# Altium PCB 3043-1-1532.PcbDoc (part 2 of 2)
Units mm, origin at the board's own origin, x right, y up, seen from the top; angles counter-clockwise.
Board outline 86 x 85.71 mm, 4 copper layers (Top Layer, MidLayer1, MidLayer2, Bottom Layer); 155 components, 106 nets, 490 pads, 369 vias.
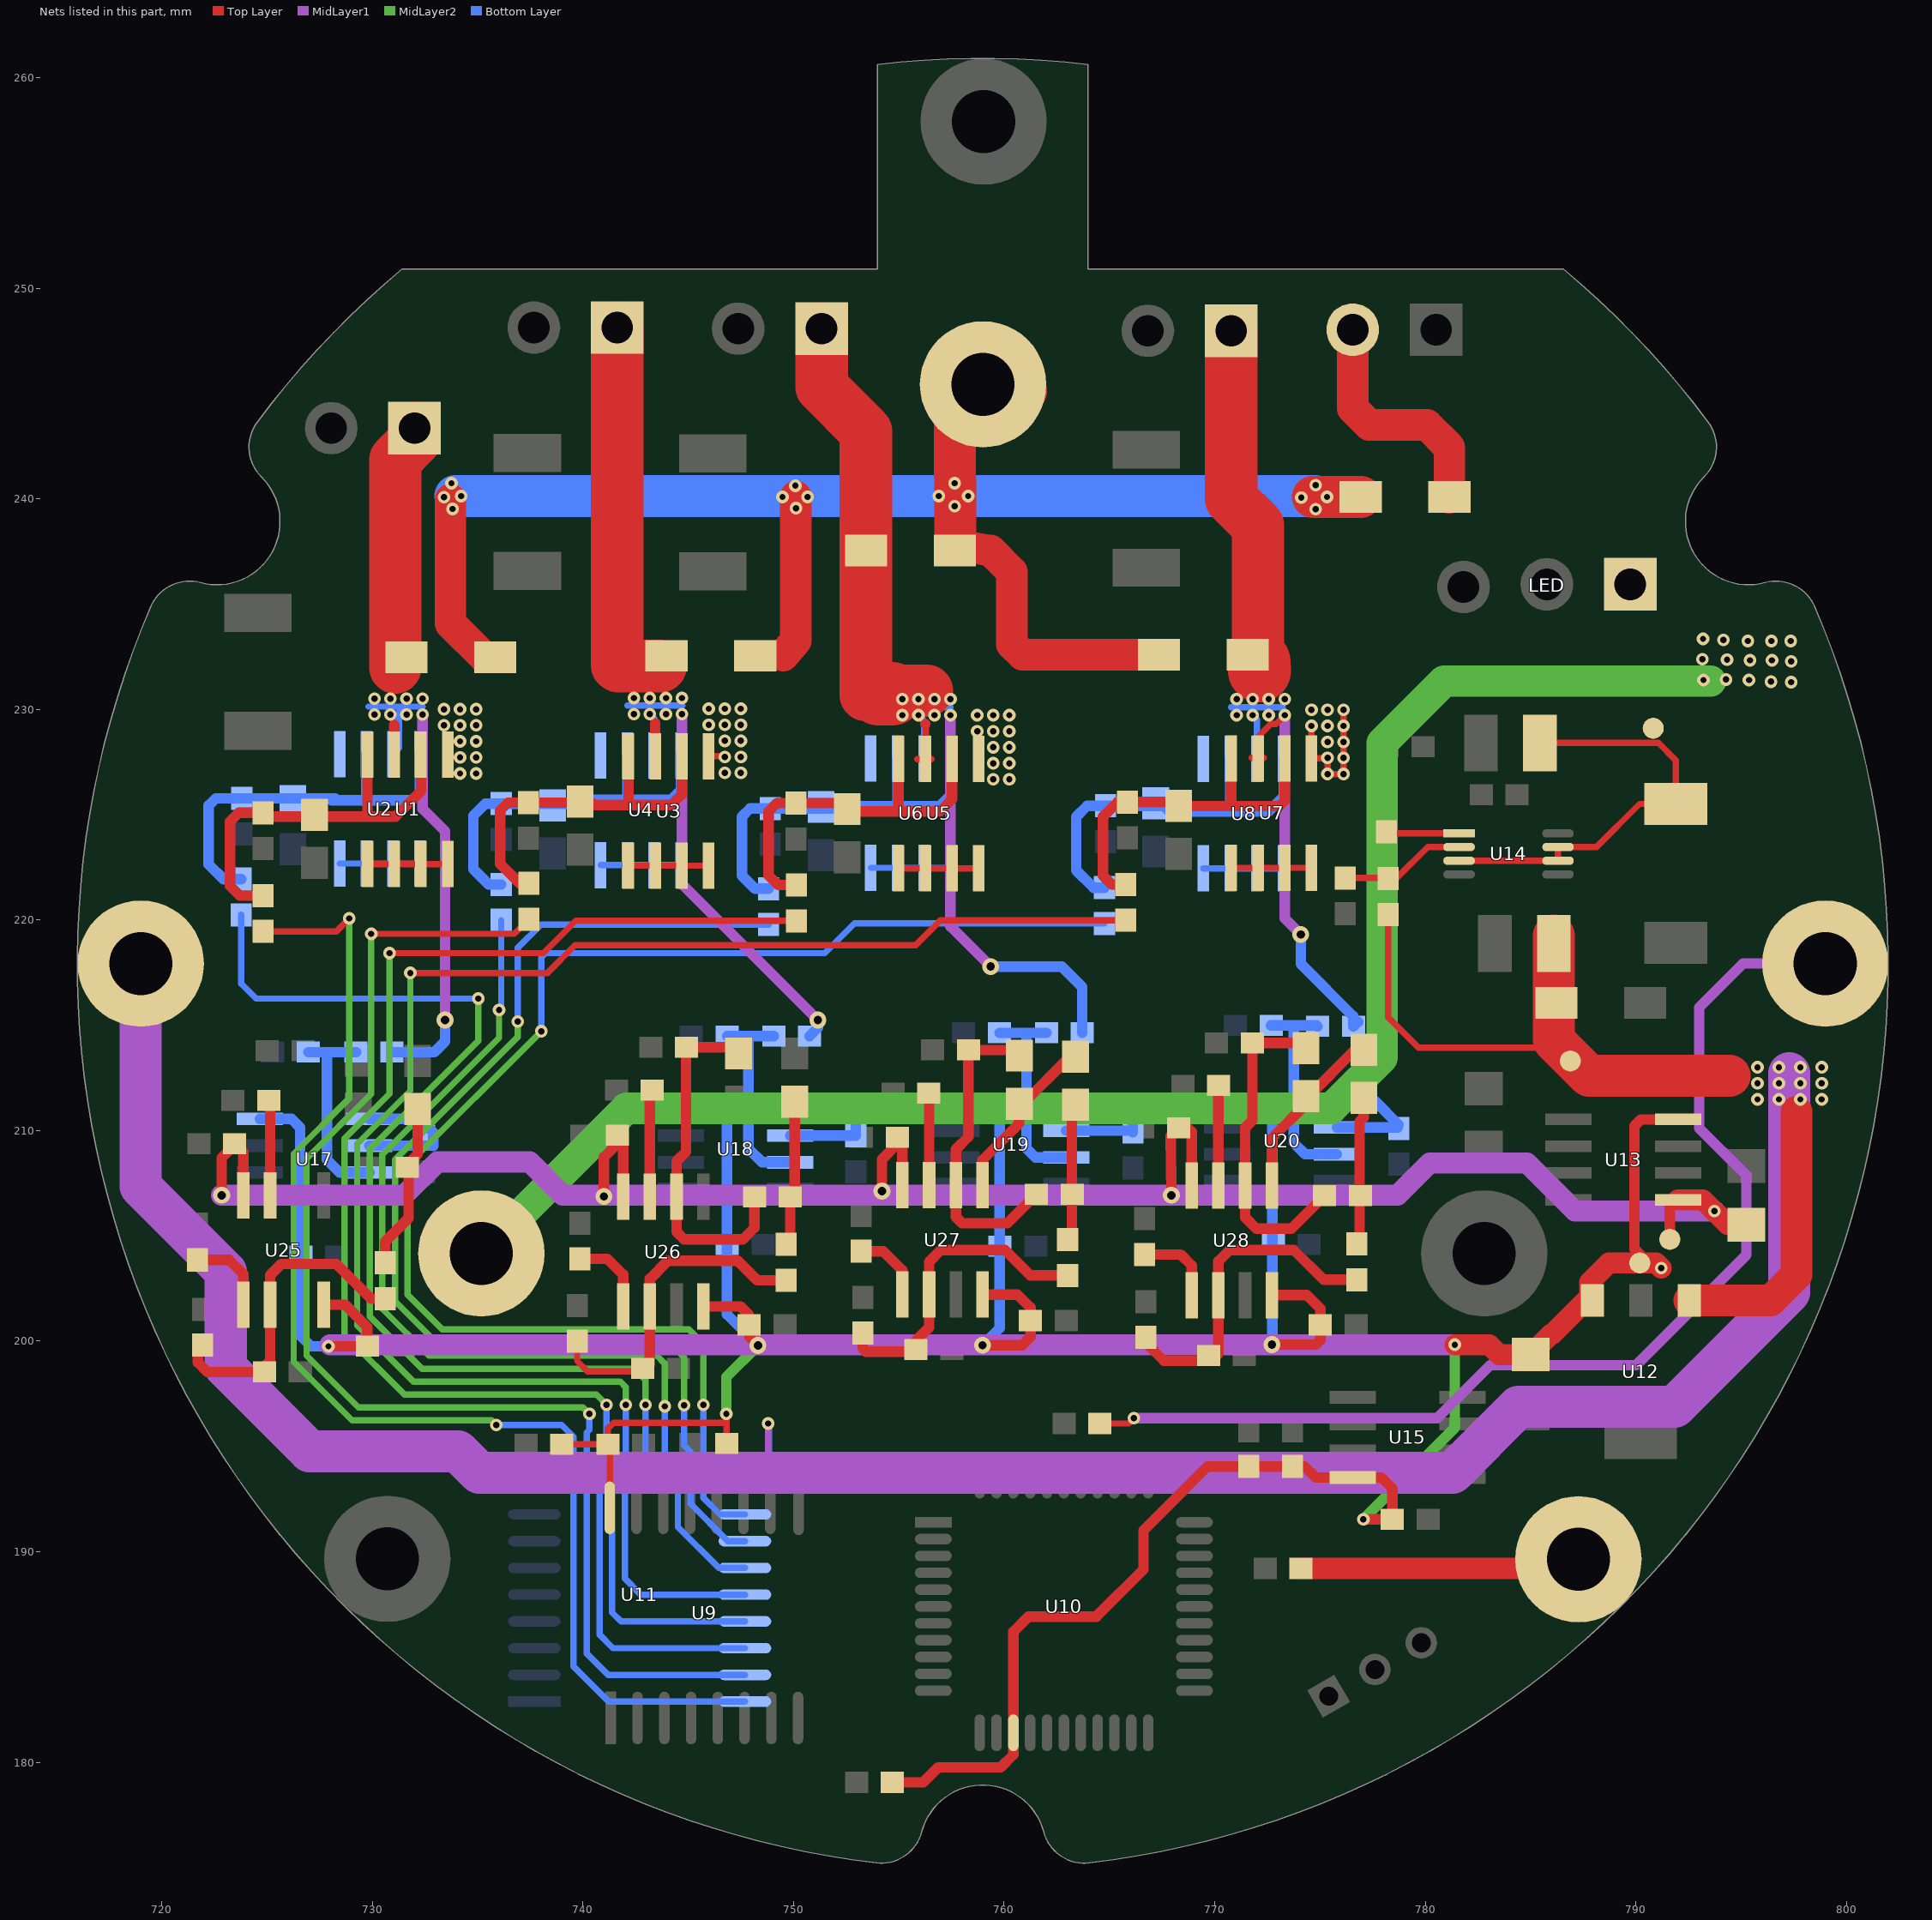
[diagram p4: the nets of this part, all layers, seen from the top]

## Via types
v1: diameter 0.6, hole 0.3, Top Layer to Bottom Layer, 347 vias
v2: diameter 0.8, hole 0.4, Top Layer to Bottom Layer, 22 vias

## Nets (pads, with @x,y where several pads share a name; then routed paths per layer and width w, separated by ;. In a path a pad name is that pad's centre, name@x,y a point inside that pad or via, vN(x,y) a via of type N, cw(c..) or ccw(c..) an arc to the next point about the centre after c; other vN are vias at no path point) (continued)
NetD8_2: D8.2 R44.2 R46.1 U26.2 | length 17.2
  Top Layer w0.5: R46.1@744.892,214.055 744.892,208.987 744.449,208.544 744.449,205.191 744.804,204.835 747.598,204.835 748.145,205.382 R44.2@748.145,206.842 ; R46.1@744.918,213.954 D8.2@747.573,213.954
NetD9_1: D9.1 R43.1 R47.2 | length 7.9
  Top Layer w0.5: R47.2@730.606,203.715 730.606,204.724 731.723,205.842 731.723,208.439 732.15,208.866 D9.1@732.15,211.019
NetD10_1: D10.1 R44.1 R48.2 | length 6.9
  Top Layer w0.5: R48.2@749.845,204.607 R44.1@749.845,206.842 750.057,207.053 D10.1@750.057,211.374
NetD11_1: D11.1 D13.2 U27.1 | length 7.9
  Top Layer w0.5: U27.1@758.977,207.41 758.977,208.597 760.705,210.324 760.705,211.084 D13.2@763.219,213.598
NetD11_2: D11.2 R57.2 R59.1 U27.2 | length 15.1
  Top Layer w0.5: D11.2@760.705,213.824 758.306,213.824 R59.1@758.303,213.827 758.303,209.698 757.707,209.102 757.707,205.902 758.012,205.597 760.159,205.597 R57.2@761.531,206.969
NetD12_1: D12.1 D14.2 U28.1 | length 8.5
  Top Layer w0.5: U28.1@772.719,207.384 772.719,209.636 774.339,211.256 D12.1@774.339,211.628 ; D12.1@774.457,211.628 776.667,213.838 D14.2@777.082,213.838 D14.2@777.082,213.745
NetD12_2: D12.2 R58.2 R60.1 U28.2 | length 15.7
  Top Layer w0.5: D12.2@774.319,213.977 774.139,214.157 R60.1@771.791,214.157 771.791,210.486 771.449,210.144 771.449,205.877 771.982,205.343 773.647,205.343 R58.2@775.222,206.918
NetD13_1: D13.1 R57.1 R61.2 | length 6.5
  Top Layer w0.5: R61.2@763.219,204.822 763.219,211.049 D13.1@763.392,211.222
NetD14_1: D14.1 R58.1 R62.2 | length 7
  Top Layer w0.5: R62.2@776.884,204.657 776.884,210.426 777.082,210.624 D14.1@777.082,211.552
NetD19_2: D19.2 D20.2 D21.2 D22.2 D23.2 VMNG_IN.1 | length 85.7
  Top Layer w1.5: 733.704,239.979 733.704,234.086 735.32,232.47 D19.2@736.067,232.47 ; 749.503,232.547 750.113,233.258 750.113,240.116 ; D21.2@757.682,237.82 759.358,237.541 760.374,236.525 760.374,233.096 760.873,232.597 D22.2@767.359,232.597
  Top Layer w2: VMNG_IN.1@757.479,246.186 759.943,246.186 VMNG_IN.1@761.034,245.095 ; D21.2@757.682,237.82 757.657,244.17 VMNG_IN.1@758.927,245.44 ; 774.675,240.09 D23.2@776.935,240.09
  Bottom Layer w2: v1@733.933,240.132 774.776,240.132
  other v1: 774.802,239.506 733.806,239.522 750.113,239.557 757.657,239.649 774.116,240.065 733.4,240.081 749.478,240.09 750.672,240.09 775.335,240.09 734.212,240.132 756.895,240.132 758.292,240.132 750.087,240.624 774.802,240.649 733.755,240.741 757.657,240.741
NetR14_2: R14.2 R15.1 U14.2 | length 6
  Top Layer w0.3: R15.1@776.199,221.992 778.649,221.992 780.121,223.464 U14.2@781.609,223.464
NetR24_1: R24.1 R28.2 U17.3 | length 9.6
  Bottom Layer w0.5: R28.2@726.96,213.725 R24.1@729.222,213.725 ; 727.837,213.725 727.837,208.62 728.445,208.012 U17.3@729.853,208.012
NetR25_1: R25.1 R29.2 U18.3 | length 9.8
  Bottom Layer w0.5: R29.2@746.848,214.487 R25.1@749.06,214.487 ; 747.852,214.487 747.852,209.153 748.513,208.493 U18.3@749.843,208.493
NetR26_1: R26.1 U17.1 U17.2 | length 7
  Bottom Layer w0.5: U17.2@729.853,209.282 R26.1@732.856,209.282 ; U17.1@729.853,210.552 732.255,210.552 732.892,209.915 R26.1@732.892,209.267
NetR27_1: R27.1 U18.1 U18.2 | length 7.1
  Bottom Layer w0.5: U18.2@749.843,209.763 R27.1@752.944,209.763 ; U18.1@749.843,211.033 752.323,211.033 752.958,210.398 R27.1@752.958,209.749
NetR30_1: R30.1 R34.2 U19.3 | length 9.8
  Bottom Layer w0.5: R34.2@759.777,214.64 R30.1@762.014,214.64 ; 761.06,214.64 761.06,209.153 761.492,208.721 U19.3@762.949,208.721
NetR31_1: R31.1 R35.2 U20.3 | length 10.1
  Bottom Layer w0.5: R35.2@772.68,214.995 774.841,214.995 R31.1@774.891,214.944 ; 773.76,214.995 773.76,209.407 774.294,208.874 U20.3@775.801,208.874
NetR32_1: R32.1 U19.1 U19.2 | length 7.2
  Bottom Layer w0.5: U19.2@762.949,209.991 766.05,209.991 R32.1@766.115,209.927 766.115,210.449 765.302,211.261 U19.1@762.949,211.261
NetR33_1: R33.1 U20.1 U20.2 | length 6.3
  Bottom Layer w0.5: U20.2@775.801,210.144 R33.1@778.7,210.144 ; U20.1@775.801,211.414 777.596,211.414 R33.1@778.739,210.271
NetR37_1: R37.1 U14.1 | length 3.4
  Top Layer w0.3: R37.1@778.219,224.114 U14.1@781.609,224.114
NetR39_1: R39.1 R40.2 R47.1 U25.6 | length 15.3
  Top Layer w0.5: R39.1@721.716,199.792 721.716,198.991 722.173,198.533 R40.2@724.879,198.533 ; R40.2@724.662,198.584 725.145,199.067 725.145,203.131 725.678,203.664 728.287,203.664 729.936,202.015 R47.1@730.606,202.015
NetR41_1: R41.1 R42.2 R48.1 U26.6 | length 16.4
  Top Layer w0.3: R41.1@739.724,199.988 739.724,199.06 740.223,198.561 R42.2@742.837,198.561
  Top Layer w0.5: R42.2@742.645,198.561 742.837,198.561 743.179,198.903 743.179,202.956 744.042,203.819 747.344,203.819 748.27,202.893 R48.1@749.859,202.893
NetR49_1: R49.1 U25.3 | length 4.5
  Top Layer w0.5: U25.3@725.145,206.925 R49.1@725.145,211.375
NetR50_1: R50.1 U26.3 | length 5
  Top Layer w0.5: U26.3@743.179,206.851 R50.1@743.179,211.808
NetR51_1: R51.1 U25.5 | length 3.9
  Top Layer w0.5: R51.1@721.69,203.856 723.201,203.856 723.875,203.182 U25.5@723.875,201.725
NetR52_1: R52.1 U26.5 | length 4
  Top Layer w0.5: R52.1@739.699,203.909 741.158,203.909 741.909,203.159 U26.5@741.909,201.651
NetR53_1: R53.1 R54.2 R61.1 U27.6 | length 15.3
  Top Layer w0.5: R53.1@753.288,200.378 753.288,199.654 753.44,199.501 R54.2@755.816,199.501 ; R54.2@755.816,199.603 755.816,200.031 756.437,200.653 756.437,203.768 756.996,204.327 760.044,204.327 761.25,203.122 R61.1@763.219,203.122
NetR55_1: R55.1 R56.2 R62.1 U28.6 | length 16.2
  Top Layer w0.5: R55.1@766.724,200.175 766.724,199.933 767.588,199.069 769.837,199.069 770.179,199.411 770.179,203.794 770.712,204.327 773.76,204.327 775.169,202.918 R62.1@776.961,202.918
NetR63_1: R63.1 U27.3 | length 4.3
  Top Layer w0.5: U27.3@756.437,207.41 R63.1@756.437,211.756
NetR64_1: R64.1 U28.3 | length 4.8
  Top Layer w0.5: U28.3@770.179,207.384 R64.1@770.179,212.139
NetR65_1: R65.1 U27.5 | length 3.5
  Top Layer w0.5: R65.1@753.212,204.265 754.265,204.265 755.167,203.362 U27.5@755.167,202.21
NetR66_1: R66.1 U28.5 | length 3.9
  Top Layer w0.5: R66.1@766.674,204.112 768.387,204.112 768.909,203.591 U28.5@768.909,202.184
NetU1_5: U1.5 U1.6 U1.7 U1.8 | length 3.8
  Top Layer w0.3: U1.5@729.767,222.657 U1.8@733.577,222.657
NetU2_5: U2.5 U2.6 U2.7 U2.8 | length 3.8
  Bottom Layer w0.3: U2.8@728.447,222.682 U2.5@732.257,222.682
NetU3_5: U3.5 U3.6 U3.7 U3.8 | length 3.8
  Top Layer w0.3: U3.5@742.163,222.581 U3.8@745.973,222.581
NetU4_5: U4.5 U4.6 U4.7 U4.8 | length 3.8
  Bottom Layer w0.3: U4.8@740.842,222.606 U4.5@744.652,222.606
NetU5_5: U5.5 U5.6 U5.7 U5.8 | length 3.8
  Top Layer w0.3: U5.5@754.99,222.454 U5.8@758.8,222.454
NetU6_5: U6.5 U6.6 U6.7 U6.8 | length 3.8
  Bottom Layer w0.3: U6.8@753.669,222.479 U6.5@757.479,222.479
NetU7_5: U7.5 U7.6 U7.7 U7.8 | length 3.8
  Top Layer w0.3: U7.5@770.788,222.479 U7.8@774.598,222.479
NetU8_5: U8.5 U8.6 U8.7 U8.8 | length 3.8
  Bottom Layer w0.3: U8.8@769.468,222.454 U8.5@773.278,222.454
NS1_1: R17.1 U11.18 | length 61
  Top Layer w0.3: R17.1@724.814,219.454 728.282,219.454 v1(728.904,220.075)
  MidLayer2 w0.3: v1(728.904,220.075) 728.904,211.537 726.262,208.895 726.262,199.009 729.031,196.24 735.66,196.24 v1(735.889,196.012)
  Bottom Layer w0.3: v1(735.889,196.012) 738.988,196.012 739.546,195.453 739.546,184.556 741.223,182.88 U11.18@747.692,182.88
NS1_2: R18.1 U11.17 | length 63
  Top Layer w0.3: v1(729.945,219.339) 736.739,219.339 R18.1@737.438,220.038
  MidLayer2 w0.3: v1(729.945,219.339) 729.945,211.73 726.872,208.656 726.872,199.314 729.336,196.85 740.004,196.85 v1(740.308,196.545)
  Bottom Layer w0.3: v1(740.308,196.545) 740.308,195.783 740.187,195.661 740.187,185.161 741.197,184.15 U11.17@747.692,184.15
NS1_3: R19.1 U11.16 | length 71.2
  Top Layer w0.3: v1(730.809,218.424) 738.124,218.424 739.662,219.962 R19.1@750.138,219.962 R19.1@750.138,219.77
  MidLayer2 w0.3: v1(730.809,218.424) 730.809,211.745 728.675,209.611 728.675,200.304 731.52,197.46 740.639,197.46 v1(741.121,196.977)
  Bottom Layer w0.3: v1(741.121,196.977) 741.121,194.996 740.787,194.661 740.787,186.059 741.426,185.42 U11.16@747.692,185.42
NS1_4: R20.1 U11.15 | length 84.2
  Top Layer w0.3: v1(731.799,217.484) 738.302,217.484 739.623,218.805 755.802,218.805 756.984,219.987 R20.1@765.785,219.987
  MidLayer2 w0.3: v1(731.799,217.484) 731.799,211.887 729.275,209.363 729.275,200.746 731.952,198.069 741.782,198.069 742.036,197.815 v1(742.036,196.977)
  Bottom Layer w0.3: v1(742.036,196.977) 742.036,194.513 741.387,193.864 741.387,187.11 741.807,186.69 U11.15@747.692,186.69
NS2_1: R21.1 U11.14 | length 62.3
  MidLayer2 w0.3: v1(735.025,216.265) 735.025,214.264 729.875,209.114 729.875,201.162 732.358,198.679 742.442,198.679 742.975,198.145 v1(742.975,196.977)
  Bottom Layer w0.3: R21.1@723.773,220.241 723.773,216.976 724.484,216.265 v1(735.025,216.265) ; v1(742.975,196.977) 742.975,194.285 741.987,193.296 741.987,188.72 742.747,187.96 U11.14@747.692,187.96
NS2_2: R22.1 U11.13 | length 47.3
  MidLayer2 w0.3: v1(736.016,215.732) 736.016,214.406 730.475,208.866 730.475,201.527 732.688,199.314 743.509,199.314 743.89,198.933 v1(743.89,196.901)
  Bottom Layer w0.3: v1(736.016,215.732) 736.117,215.833 R22.1@736.117,219.987 ; v1(743.89,196.901) 743.89,194.701 744.509,194.081 744.509,191.176 746.455,189.23 U11.13@747.692,189.23
NS2_3: R23.1 U11.12 | length 56.8
  MidLayer2 w0.3: v1(736.905,215.173) 736.905,214.447 731.075,208.617 731.075,201.892 733.044,199.923 744.118,199.923 744.804,199.238 v1(744.804,196.952)
  Bottom Layer w0.3: v1(736.905,215.173) 736.905,218.678 738.011,219.784 R23.1@748.817,219.784 ; v1(744.804,196.952) 744.804,195.047 745.109,194.742 745.109,192.278 746.887,190.5 U11.12@747.692,190.5
NS2_4: R36.1 U11.11 | length 70.7
  MidLayer2 w0.3: v1(738.022,214.716) 731.675,208.369 731.675,202.207 733.323,200.558 745.033,200.558 745.719,199.873 v1(745.719,196.977)
  Bottom Layer w0.3: v1(738.022,214.716) 738.022,218.221 738.226,218.424 751.484,218.424 752.895,219.835 R36.1@764.769,219.835 ; v1(745.719,196.977) 745.719,192.557 746.506,191.77 U11.11@747.692,191.77
RXD: R69.2 RxD.1 | length 53.5
  Top Layer w0.3: R69.2@764.552,196.088 765.912,196.088 v1(766.166,196.342)
  MidLayer1 w0.5: v1(766.166,196.342) 780.567,196.342 783.082,198.857 790.016,198.857 795.249,204.089 795.249,207.874 793.013,210.109 793.013,215.849 795.096,217.932 RxD.1@799,217.932
S1_1: D1.2 R1.1 R17.2 U1.2 U1.4 | length 19.2
  Top Layer w0.5: R17.2@724.814,221.154 723.71,221.154 723.24,221.625 723.24,224.673 723.658,225.091 R1.1@724.814,225.091 724.99,224.915 731.102,224.915 732.307,226.12 U1.2@732.307,227.857 ; 729.767,224.991 U1.4@729.767,227.857
S1_2: D4.2 R7.1 R18.2 U3.2 U3.4 | length 17.5
  Top Layer w0.5: R18.2@737.438,221.738 736.995,221.738 736.067,222.666 736.067,225.206 736.434,225.573 740.421,225.573 740.534,225.46 744.195,225.46 744.703,225.968 U3.2@744.703,227.781 ; 742.163,225.46 U3.4@742.163,227.781
S1_3: D6.2 R11.1 R19.2 U5.2 U5.4 | length 18.2
  Top Layer w0.5: R19.2@750.138,221.662 749.263,221.662 748.817,222.107 748.817,225.155 749.21,225.548 752.266,225.548 752.659,225.155 756.945,225.155 757.53,225.739 U5.2@757.53,227.654 ; 754.99,225.231 U5.4@754.99,227.654
S1_4: D16.2 R13.1 R20.2 U7.2 U7.4 | length 17.2
  Top Layer w0.5: R20.2@765.785,221.687 765.112,221.687 764.692,222.107 764.692,224.901 765.39,225.599 768.116,225.599 768.305,225.409 773.074,225.409 773.328,225.663 U7.2@773.328,227.679 ; 770.788,225.663 U7.4@770.788,227.679
S2_1: D2.2 R2.1 R21.2 U2.2 U2.4 | length 19.3
  Bottom Layer w0.3: 729.59,225.689 729.717,225.816
  Bottom Layer w0.5: R21.2@723.773,221.941 722.923,221.941 722.224,222.641 722.224,225.435 722.566,225.777 728.232,225.777 728.32,225.689 ; 728.066,225.689 731.876,225.689 732.257,226.07 U2.4@732.257,227.882 ; 729.717,225.816 U2.2@729.717,227.882
S2_2: D5.2 R10.1 R22.2 U4.2 U4.4 | length 18.2
  Bottom Layer w0.5: R22.2@736.117,221.687 735.521,221.687 734.797,222.412 734.797,224.952 735.367,225.523 739.939,225.523 740.131,225.714 744.195,225.714 744.652,226.171 U4.4@744.652,227.806 ; 742.112,225.765 U4.2@742.112,227.806
S2_3: D15.2 R12.1 R23.2 U6.2 U6.4 | length 18.7
  Bottom Layer w0.5: R23.2@748.817,221.484 748.171,221.484 747.547,222.107 747.547,224.901 747.94,225.294 752.512,225.294 752.627,225.409 756.945,225.409 757.479,225.943 U6.4@757.479,227.679 ; 754.939,225.435 U6.2@754.939,227.679
S2_4: D18.2 R16.1 R36.2 U8.2 U8.4 | length 18.9
  Bottom Layer w0.5: R36.2@764.769,221.535 764.249,221.535 763.422,222.361 763.422,224.901 763.942,225.421 767.573,225.421 767.839,225.155 772.566,225.155 773.278,225.866 U8.4@773.278,227.654 ; 770.738,225.206 U8.2@770.738,227.654
TXD: R68.2 TxD.1 | length 13.3
  Top Layer w0.5: TxD.1@786.841,189.205 TxD.1@787.273,189.636
  Top Layer w1: R68.2@774.102,189.205 TxD.1@786.841,189.205
V_BT1: -B1+.1 D19.1 R24.2 U1.3 U2.3 | length 38.4
  Top Layer w0.5: U1.3@731.037,227.857 731.037,229.27
  Top Layer w2.5: D19.1@731.088,232.004 731.088,241.859 732.003,242.773 -B1+.1@732.003,243.357
  MidLayer1 w0.5: v1(732.384,229.753) 732.384,225.282 733.45,224.215 v2(733.45,215.249)
  Bottom Layer w0.3: 729.818,230.134 732.384,230.134 ; v1@730.987,229.499 U2.3@730.987,227.882 731.266,228.162 731.266,230.134
  Bottom Layer w0.5: R24.2@730.922,213.725 732.942,213.725 733.45,214.233 v2(733.45,215.249)
  other v1: 730.098,229.753 730.86,229.753 731.622,229.753 730.098,230.515 730.86,230.515 731.622,230.515 732.384,230.515
V_BT2: -B2+.1 D20.1 R25.2 U3.3 U4.3 | length 44.6
  Top Layer w0.5: U3.3@743.433,227.781 743.433,229.346
  Top Layer w2.5: -B2+.1@741.629,248.133 741.629,232.105 741.68,232.054 D20.1@743.687,232.054
  MidLayer1 w0.5: v1(744.703,229.778) 744.703,221.701 v2(751.154,215.249)
  Bottom Layer w0.3: 742.112,230.184 744.728,230.184 ; v1(743.179,229.778) 743.382,229.575 U4.3@743.382,227.806 ; U4.3@743.382,227.263 743.382,228.102 743.382,229.372
  Bottom Layer w0.5: R25.2@750.76,214.487 751.154,214.882 v2(751.154,215.249)
  other v1: 742.417,229.778 743.941,229.778 742.417,230.54 743.179,230.54 743.941,230.54 744.703,230.54
V_BT3: -B3+.1 D21.1 R30.2 U5.3 U6.3 | length 49.3
  Top Layer w0.3: 755.879,227.644 756.564,227.644 ; U5.3@756.285,227.035 756.285,229.295
  Top Layer w0.5: 756.26,229.295 756.26,229.321
  Top Layer w2.5: -B3+.1@751.332,248.082 751.332,245.313 753.44,243.205 753.44,230.683 753.643,230.886 756.336,230.886
  Top Layer w3: 754.05,230.743 754.685,230.743
  MidLayer1 w0.5: v1(757.453,229.727) 757.453,219.694 v2(759.358,217.789)
  Bottom Layer w0.3: 754.863,230.108 757.453,230.108 ; v1(755.929,229.727) 756.209,229.448 U6.3@756.209,227.679
  Bottom Layer w0.5: v2(759.358,217.789) 762.737,217.789 763.714,216.812 R30.2@763.714,214.64
  other v1: 755.167,229.727 756.691,229.727 755.167,230.489 755.929,230.489 756.691,230.489 757.453,230.489
V_BT4: -B4+.1 D22.1 R31.2 U7.3 U8.3 | length 40.6
  Top Layer w0.3: 771.754,227.695 772.338,227.695 ; U7.3@772.058,227.679 772.058,228.702 772.668,229.311 772.912,229.311 v1(773.328,229.727)
  Top Layer w2.5: -B4+.1@770.788,247.98 770.788,240.005 772.058,238.735 D22.1@772.058,232.664
  Top Layer w3: D22.1@772.109,232.267 772.135,231.835
  MidLayer1 w0.5: v1(773.328,229.727) 773.328,220.075 v2(774.09,219.313)
  Bottom Layer w0.3: 770.788,230.108 773.227,230.108 ; v1(771.804,229.727) 772.008,229.524 U8.3@772.008,227.654
  Bottom Layer w0.5: v2(774.09,219.313) 774.09,217.918 776.591,215.417 R31.2@776.591,214.944 R31.2@776.808,215.161
  other v1: 771.042,229.727 772.566,229.727 771.042,230.489 771.804,230.489 772.566,230.489 773.328,230.489
VCC_3V3: 3V3.1 C1.1 C2.1 C9.1 C10.1 C11.1 C14.1 C15.1 C18.1 C19.1 C20.1 C21.1 C22.1 R8.1 R9.1 R38.2 R67.2 U9.16 U10.14 U12.3 U13.8 U15.8 U17.8 U18.8 U19.8 U20.8 U25.8 U26.8 U27.8 U28.8 | length 215.6
  Top Layer w0.3: C1.1@738.999,195.107 R8.1@741.186,195.107 ; U9.16@741.274,192.084 741.274,195.019 R8.1@741.186,195.107 ; 746.797,196.113 741.451,196.113 741.186,195.848 R8.1@741.186,195.107 ; R9.1@746.823,195.132 746.823,196.533 v1(746.811,196.545) v1@746.823,196.531
  Top Layer w0.5: U25.8@727.685,201.725 728.703,201.725 729.756,200.672 C10.1@729.756,199.771 ; v1(727.913,199.755) C10.1@729.638,199.755 ; U26.8@745.719,201.651 747.48,201.651 C11.1@747.891,201.24 ; C11.1@747.891,200.771 747.891,200.215 v2(748.309,199.796) ; C18.1@754.697,179.045 756.158,179.045 756.869,179.756 759.841,179.756 760.441,180.355 760.441,186.197 761.162,186.919 764.388,186.919 766.623,189.154 766.623,191.008 769.659,194.044 774.28,194.044 774.802,193.523 777.916,193.523 778.438,193.001 C9.1@778.438,191.541 v1(777.062,191.541) ; v2(758.977,199.806) 760.857,199.806 761.252,200.201 761.252,201.596 760.638,202.21 U27.8@758.977,202.21 ; v2(772.719,199.831) 774.802,199.831 775.018,200.048 775.018,201.545 774.379,202.184 U28.8@772.719,202.184 ; 790.854,203.464 789.94,204.378 789.94,210.22 790.245,210.525 U13.8@792.007,210.525
  Top Layer w1: v1(781.406,199.831) 783.047,199.831 783.514,199.365 C2.1@785.012,199.365 785.978,200.33 786.028,200.33 787.806,202.108 787.806,202.794 788.721,203.708 790.966,203.708 v1(791.21,203.464)
  MidLayer1 w1: v1@727.989,199.831 v1(781.406,199.831)
  MidLayer2 w0.5: v1(746.811,196.545) 746.811,198.298 v2(748.309,199.796) ; v1(777.062,191.541) 781.406,195.885 v1(781.406,199.831)
  Bottom Layer w0.5: U17.8@724.653,210.552 726.159,210.552 726.567,210.144 726.567,200.279 727.091,199.755 v1(727.913,199.755) ; U18.8@744.643,211.033 746.481,211.033 746.836,210.677 746.836,201.27 v2(748.309,199.796) ; U19.8@757.749,211.261 759.206,211.261 759.79,210.677 759.79,200.619 v2(758.977,199.806) ; U20.8@770.601,211.414 772.262,211.414 772.744,210.931 772.744,200.035 v2(772.719,199.831)
VCC_5V: 5V.1 C6.1 D3.2 R14.1 U11.10 U12.1 VCC5V.1 | length 158.7
  Top Layer w0.3: R14.1@778.231,220.267 778.231,215.376 779.678,213.928 786.451,213.928
  Top Layer w1.5: U12.1@792.532,201.927 796.414,201.927 797.636,203.149 797.636,210.896
  Top Layer w2: C6.1@786.108,219.262 786.108,214.271 787.781,212.598 794.461,212.598
  MidLayer1 w0.3: 748.792,193.827 v1(748.792,196.088)
  MidLayer1 w2: VCC5V.1@718.998,217.932 718.998,207.34 723.036,203.302 723.036,198.755 727.024,194.767 734.06,194.767 735.076,193.751 781.304,193.751 784.428,196.875 791.845,196.875 797.281,202.311 797.281,212.725
  Bottom Layer w0.3: U11.10@747.692,193.04 748.741,193.04 748.843,193.142 v1@748.843,196.139
  other v1: 795.782,211.48 796.798,211.48 797.814,211.48 798.83,211.48 795.782,212.242 796.798,212.242 797.814,212.242 798.83,212.242 795.782,213.004 796.798,213.004 797.814,213.004 798.83,213.004
VCC_-3V3: -3V3.1 C4.1 C12.1 C13.1 C16.1 C17.1 U13.5 U25.4 U26.4 U27.4 U28.4 | length 102.7
  Top Layer w0.5: v2(722.84,206.925) 722.84,208.703 723.29,209.153 C12.1@723.29,209.407 ; C12.1@723.455,209.382 723.875,208.962 U25.4@723.875,206.925 ; v2(740.994,206.867) 740.994,208.738 741.641,209.385 C13.1@741.641,209.788 ; C13.1@741.756,209.915 741.909,209.763 U26.4@741.909,206.851 ; v2(754.202,207.121) 754.202,208.637 C17.1@754.925,209.36 ; C17.1@754.925,209.687 755.193,209.687 755.167,209.661 U27.4@755.167,207.41 ; v2(767.944,206.925) 767.918,209.751 C16.1@768.286,210.118 768.731,210.118 768.909,209.941 U28.4@768.909,207.384 ; -3V3.1@791.616,204.835 791.616,206.562 U13.5@791.718,206.664
  Top Layer w1: U13.5@792.007,206.715 793.191,206.715 794.385,205.521 C4.1@795.249,205.521
  MidLayer1 w1: v2(722.84,206.925) 731.511,206.925 733.095,208.509 737.464,208.509 739.048,206.925 778.679,206.925 780.212,208.458 784.835,208.458 787.118,206.175 v1(793.731,206.175)
VCC_BAT: LED.1 U2.1 U4.1 U6.1 U8.1
VCC_CHARGE: D23.1 SOLAR.2 U1.1 U3.1 U5.1 U7.1 | length 19.1
  Top Layer w0.3: U3.1@745.973,227.781 v1@746.7,227.781 ; v1(774.598,229.219) U7.1@774.598,227.679 v1@775.344,227.679 ; v1(775.36,227.695) v1(775.36,226.933) v1(776.122,226.933) v1(776.122,229.981)
  Top Layer w1.5: SOLAR.2@776.557,248.031 776.557,244.295 777.342,243.51 780.085,243.51 781.152,242.443 D23.1@781.152,240.09 ; D23.1@781.126,240.04 D23.1@781.126,240.09
  other v1: 759.485,226.679 760.247,226.679 734.162,226.959 734.924,226.959 746.735,226.984 747.497,226.984 759.485,227.441 760.247,227.441 776.122,227.695 734.162,227.721 734.924,227.721 746.735,227.746 747.497,227.746 759.485,228.203 760.247,228.203 775.36,228.457 776.122,228.457 734.162,228.483 734.924,228.483 746.735,228.508 747.497,228.508 758.723,228.965 759.485,228.965 760.247,228.965 775.36,229.219 776.122,229.219 733.4,229.245 734.162,229.245 734.924,229.245 745.973,229.27 746.735,229.27 747.497,229.27 758.723,229.727 759.485,229.727 760.247,229.727 774.598,229.981 775.36,229.981 733.4,230.007 734.162,230.007 734.924,230.007 745.973,230.032 746.735,230.032 747.497,230.032
VCC_MNG: BAT.1 C5.1 L2.1 U14.3 U14.6 U14.7 VMNG_OUT.1 | length 99
  Top Layer w0.3: U14.3@781.609,222.814 U14.6@786.304,222.814 U14.7@786.304,223.464 788.131,223.464 790.178,225.511 L2.1@791.896,225.511 791.896,227.584 791.073,228.406 C5.1@785.447,228.406
  MidLayer2 w1.5: VMNG_OUT.1@735.178,204.165 742.061,211.049 775.538,211.049 777.951,213.462 777.951,228.397 780.898,231.343 793.547,231.343
  other v1: 797.382,231.292 796.417,231.318 793.217,231.394 795.376,231.394 794.283,231.419 797.382,232.283 795.426,232.334 796.468,232.334 794.334,232.359 793.166,232.385 795.325,233.248 796.442,233.248 797.357,233.248 794.156,233.299 793.191,233.35
pads on no net: U9.13 U10.3 U10.13 U10.15 U10.17 U10.20 U10.21 U10.22 U10.23 U10.24 U10.25 U10.26 U10.27 U10.28 U10.29 U10.30 U10.31 U10.32 U10.33 U10.36 U10.37 U10.38 U10.40 U10.41 U10.42 U10.43 U10.44 U13.7 U17.5 U17.6 U17.7 U18.5 U18.6 U18.7 U19.5 U19.6 U19.7 U20.5 U20.6 U20.7

## Polygon pours and split planes (outlines as drawn)
VCC_MNG on Top Layer (solid, remove dead copper): 784.784,227.111 786.308,227.111 786.308,225.079 787.578,225.079 787.578,223.555 785.8,223.555 785.8,222.793 788.848,222.793 789.864,223.809 795.198,223.809 795.198,223.825 797.662,223.825 797.662,234.036 792.48,234.036 792.48,229.905 784.784,229.905
VCC_5V on Top Layer (solid, remove dead copper): 785.038,213.928 787.587,211.379 793.902,211.379 793.902,210.744 799.694,210.744 799.694,213.792 788.086,213.792 787.349,214.528 787.349,219.735 786.917,220.167 785.038,220.167
GND on Top Layer (solid, remove dead copper): 389.128,351.028 391.16,348.996 392.176,348.996 392.938,349.758 393.446,349.758 394.462,348.742 395.478,348.742 396.748,350.012 396.748,354.33
GND on Top Layer (solid, remove dead copper): 392.938,340.868 393.446,340.36 400.05,340.36 400.304,340.614 400.304,346.456 398.78,344.932 392.938,344.932
GND on Top Layer (solid, remove dead copper): 392.938,340.868 393.446,340.36 400.05,340.36 400.304,340.614 400.304,346.456 398.78,344.932 392.938,344.932
GND on Top Layer (solid, remove dead copper): 392.938,340.868 393.446,340.36 400.05,340.36 400.304,340.614 400.304,346.456 398.78,344.932 392.938,344.932
GND on Top Layer (solid, remove dead copper): 389.128,351.028 391.16,348.996 392.176,348.996 392.938,349.758 393.446,349.758 394.462,348.742 395.478,348.742 396.748,350.012 396.748,354.33
GND on Top Layer (solid, remove dead copper): 392.938,340.868 393.446,340.36 400.05,340.36 400.304,340.614 400.304,346.456 398.78,344.932 392.938,344.932
GND on Top Layer (solid, remove dead copper): 389.128,351.028 391.16,348.996 392.176,348.996 392.938,349.758 393.446,349.758 394.462,348.742 395.478,348.742 396.748,350.012 396.748,354.33
GND on Top Layer (solid, remove dead copper): 392.938,340.868 393.446,340.36 400.05,340.36 400.304,340.614 400.304,346.456 398.78,344.932 392.938,344.932
GND on Top Layer (solid, remove dead copper): 394.97,329.946 395.478,329.438 402.082,329.438 402.336,329.692 402.336,335.534 400.812,334.01 394.97,334.01
GND on Top Layer (solid, remove dead copper): 428.872,355.233 429.909,354.196 429.909,355.233
V_BT1 on Top Layer (solid, remove dead copper): 729.59,232.293 732.638,232.293 732.638,226.705 729.59,226.705
V_BT2 on Top Layer (solid, remove dead copper): 741.909,232.572 744.957,232.572 744.957,226.73 741.909,226.73
V_BT3 on Top Layer (solid, remove dead copper): 754.659,232.013 757.707,232.013 757.707,226.425 754.659,226.425
V_BT4 on Top Layer (solid, remove dead copper): 770.534,231.759 773.582,231.759 773.582,226.425 770.534,226.425
VCC_CHARGE on Top Layer (solid, remove dead copper): 733.146,230.515 733.146,226.705 735.178,226.705 735.178,230.515
VCC_CHARGE on Top Layer (solid, remove dead copper): 745.719,230.54 745.719,226.73 747.751,226.73 747.751,230.54
VCC_CHARGE on Top Layer (solid, remove dead copper): 758.469,230.235 758.469,226.425 760.501,226.425 760.501,230.235
VCC_CHARGE on Top Layer (solid, remove dead copper): 774.344,230.489 774.344,226.679 776.376,226.679 776.376,230.489
NetD3_1 on Top Layer (solid, remove dead copper): 785.8,222.285 788.848,222.285 790.118,221.015 795.198,221.015 795.198,217.967 790.372,217.967 787.324,221.015 785.8,221.015
NetD3_1 on Top Layer (solid, remove dead copper): 788.594,220.761 788.594,214.919 795.198,214.919 795.198,220.146 788.594,220.146
GND on Top Layer (solid, remove dead copper): 783.26,229.905 783.26,225.079 779.45,225.079 779.45,229.905
GND on Top Layer (solid, remove dead copper): 779.704,222.285 784.022,222.285 784.022,214.919 779.958,214.919 779.45,215.427 779.45,221.777 779.958,222.285
GND on Top Layer (solid, remove dead copper): 764.362,238.312 769.188,238.312 769.188,235.01 764.362,235.01
GND on Top Layer (solid, remove dead copper): 743.788,238.033 748.563,238.033 748.563,234.731 743.788,234.731
GND on Top Layer (solid, remove dead copper): 734.974,238.008 739.8,238.008 739.8,234.706 734.974,234.706
GND on Top Layer (solid, remove dead copper): 722.198,230.362 726.999,230.362 726.999,227.06 722.198,227.06
NetU7_5 on Top Layer (solid, remove dead copper): 770.534,223.631 774.852,223.631 774.852,221.345 770.534,221.345
NetU5_5 on Top Layer (solid, remove dead copper): 754.659,223.631 758.977,223.631 758.977,221.345 754.659,221.345
NetU3_5 on Top Layer (solid, remove dead copper): 741.909,223.682 746.227,223.682 746.227,221.396 741.909,221.396
NetU1_5 on Top Layer (solid, remove dead copper): 729.59,223.657 733.654,223.657 733.654,221.625 729.59,221.625
GND on Top Layer (solid, remove dead copper): 713.435,263.322 804.824,263.322 804.824,173.507 712.724,173.507 712.724,262.966
VCC_5V on MidLayer1 (solid, remove dead copper): 794.963,213.766 799.668,213.766 799.668,210.718 794.842,210.718 794.842,213.766
GND on MidLayer2 (solid, remove dead copper): 715.899,261.544 802.767,261.544 802.767,174.828 714.502,174.828 714.502,261.544
VCC_MNG on MidLayer2 (solid, remove dead copper): 792.709,234.061 797.585,234.061 797.585,225.527 792.48,225.527 792.48,234.061
VCC_CHARGE on MidLayer2 (solid, remove dead copper): 733.171,226.755 733.194,226.73 773.581,226.73 773.659,226.816 773.659,226.695 776.527,226.695 776.527,229.988 780.263,234.121 780.263,244.281 777.921,246.872 777.921,249.615 775.097,249.615 775.097,236.839 772.938,234.452 733.171,234.452
GND on Bottom Layer (solid, remove dead copper): 714.4,262.331 805.18,262.331 805.18,171.526 712.521,171.526 712.521,262.484
VCC_BAT on Bottom Layer (solid, remove dead copper): 726.186,226.882 726.211,226.832 726.211,234.452 769.874,234.452 769.874,234.391 778.967,234.391 780.339,233.02 786.079,233.02 787.933,234.874 787.933,237.617 791.997,237.617 791.997,229.641 777.621,229.641 776.072,231.191 769.874,231.191 769.874,226.882
V_BT2 on Bottom Layer (solid, remove dead copper): 741.909,230.794 744.957,230.794 744.957,226.73 741.909,226.73
V_BT1 on Bottom Layer (solid, remove dead copper): 729.59,230.769 732.638,230.769 732.638,226.705 729.59,226.705
V_BT3 on Bottom Layer (solid, remove dead copper): 754.659,230.743 757.707,230.743 757.707,226.425 754.659,226.425
V_BT4 on Bottom Layer (solid, remove dead copper): 770.534,230.743 773.582,230.743 773.582,226.425 770.534,226.425
NetU2_5 on Bottom Layer (solid, remove dead copper): 728.32,223.657 732.384,223.657 732.384,221.625 728.32,221.625
NetU4_5 on Bottom Layer (solid, remove dead copper): 740.639,223.682 744.957,223.682 744.957,221.396 740.639,221.396
NetU6_5 on Bottom Layer (solid, remove dead copper): 753.389,223.631 757.707,223.631 757.707,221.345 753.389,221.345
NetU8_5 on Bottom Layer (solid, remove dead copper): 769.264,223.377 773.582,223.377 773.582,221.345 769.264,221.345

## Keep-outs
Keep-Out Layer:
  the board outline again, w0.127

## Silkscreen, mask and mechanical layers (free items; w line width, h text height)
Bottom Overlay:
  rectangle: 758.114,185.75 774.294,189.163
  text "PN:3043-1-1532" at 777.418,194.726 h1
  text "Rev:02" at 777.418,191.678 h1
  text "SN:" at 777.418,187.106 h1
Mechanical 1:
  circle w0.127: c758.985,245.418 r3
  circle w0.127: c782.801,204.168 r3
  circle w0.127: c735.169,204.168 r3
  circle w0.127: c730.701,189.634 r3
  circle w0.127: c787.269,189.634 r3
  circle w0.127: c758.985,257.918 r3
  circle w0.127: c798.985,217.918 r3
  circle w0.127: c718.985,217.918 r3